# Altium PCB ESP32_CAN_V2.1.PcbDoc
Units mm, origin at the board's own origin, x right, y up, seen from the top; angles counter-clockwise.
Board outline 80 x 75 mm, 2 copper layers (Top Layer, Bottom Layer), stack 0.533 mm thick; 87 components, 93 nets, 361 pads, 50 vias.
Unrouted connection lines stored in the file: 66.
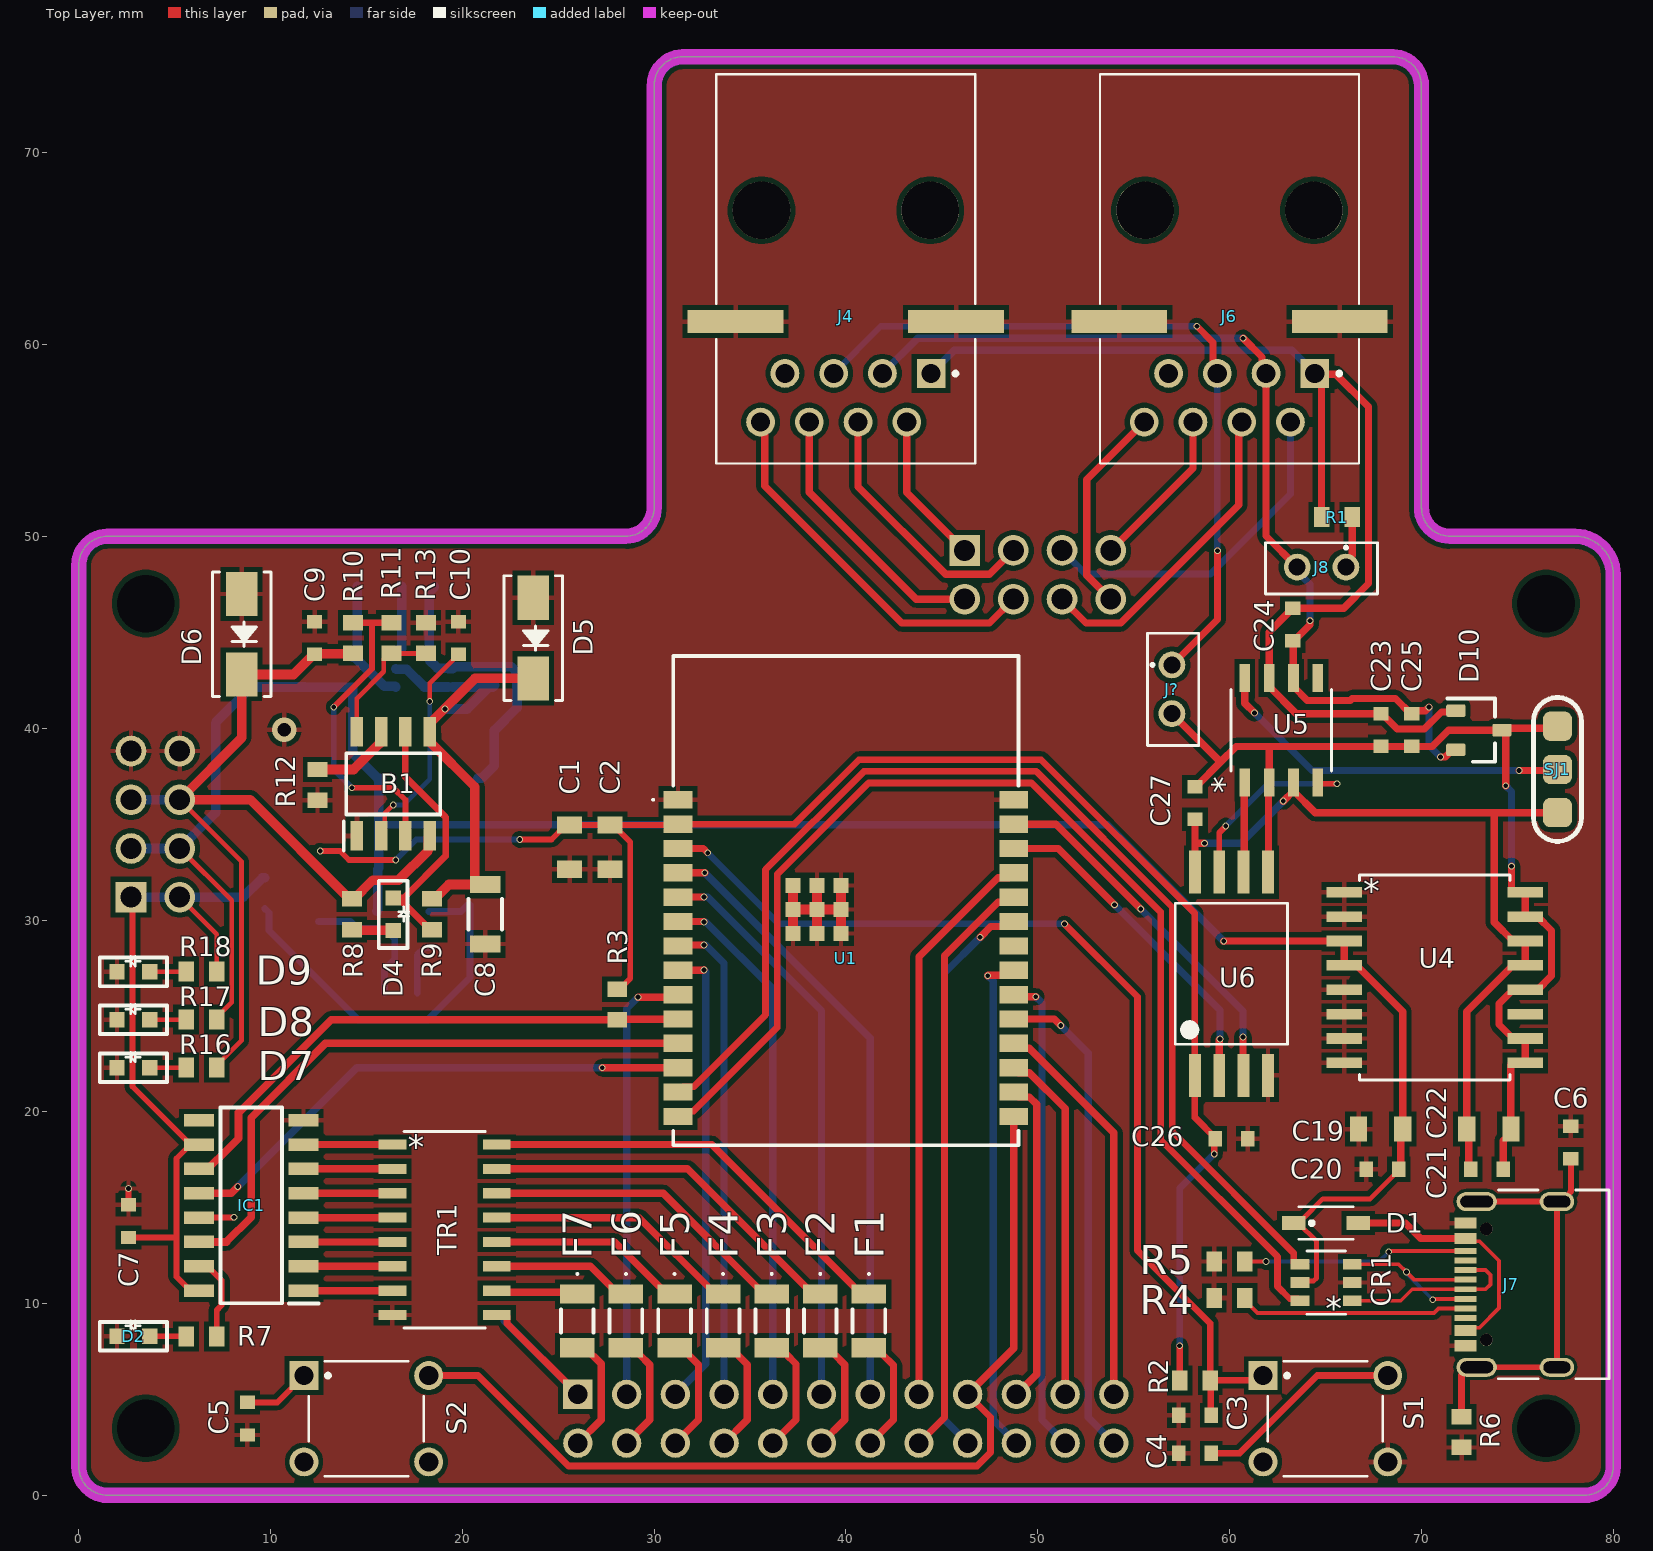
[diagram p0: Top Layer view]
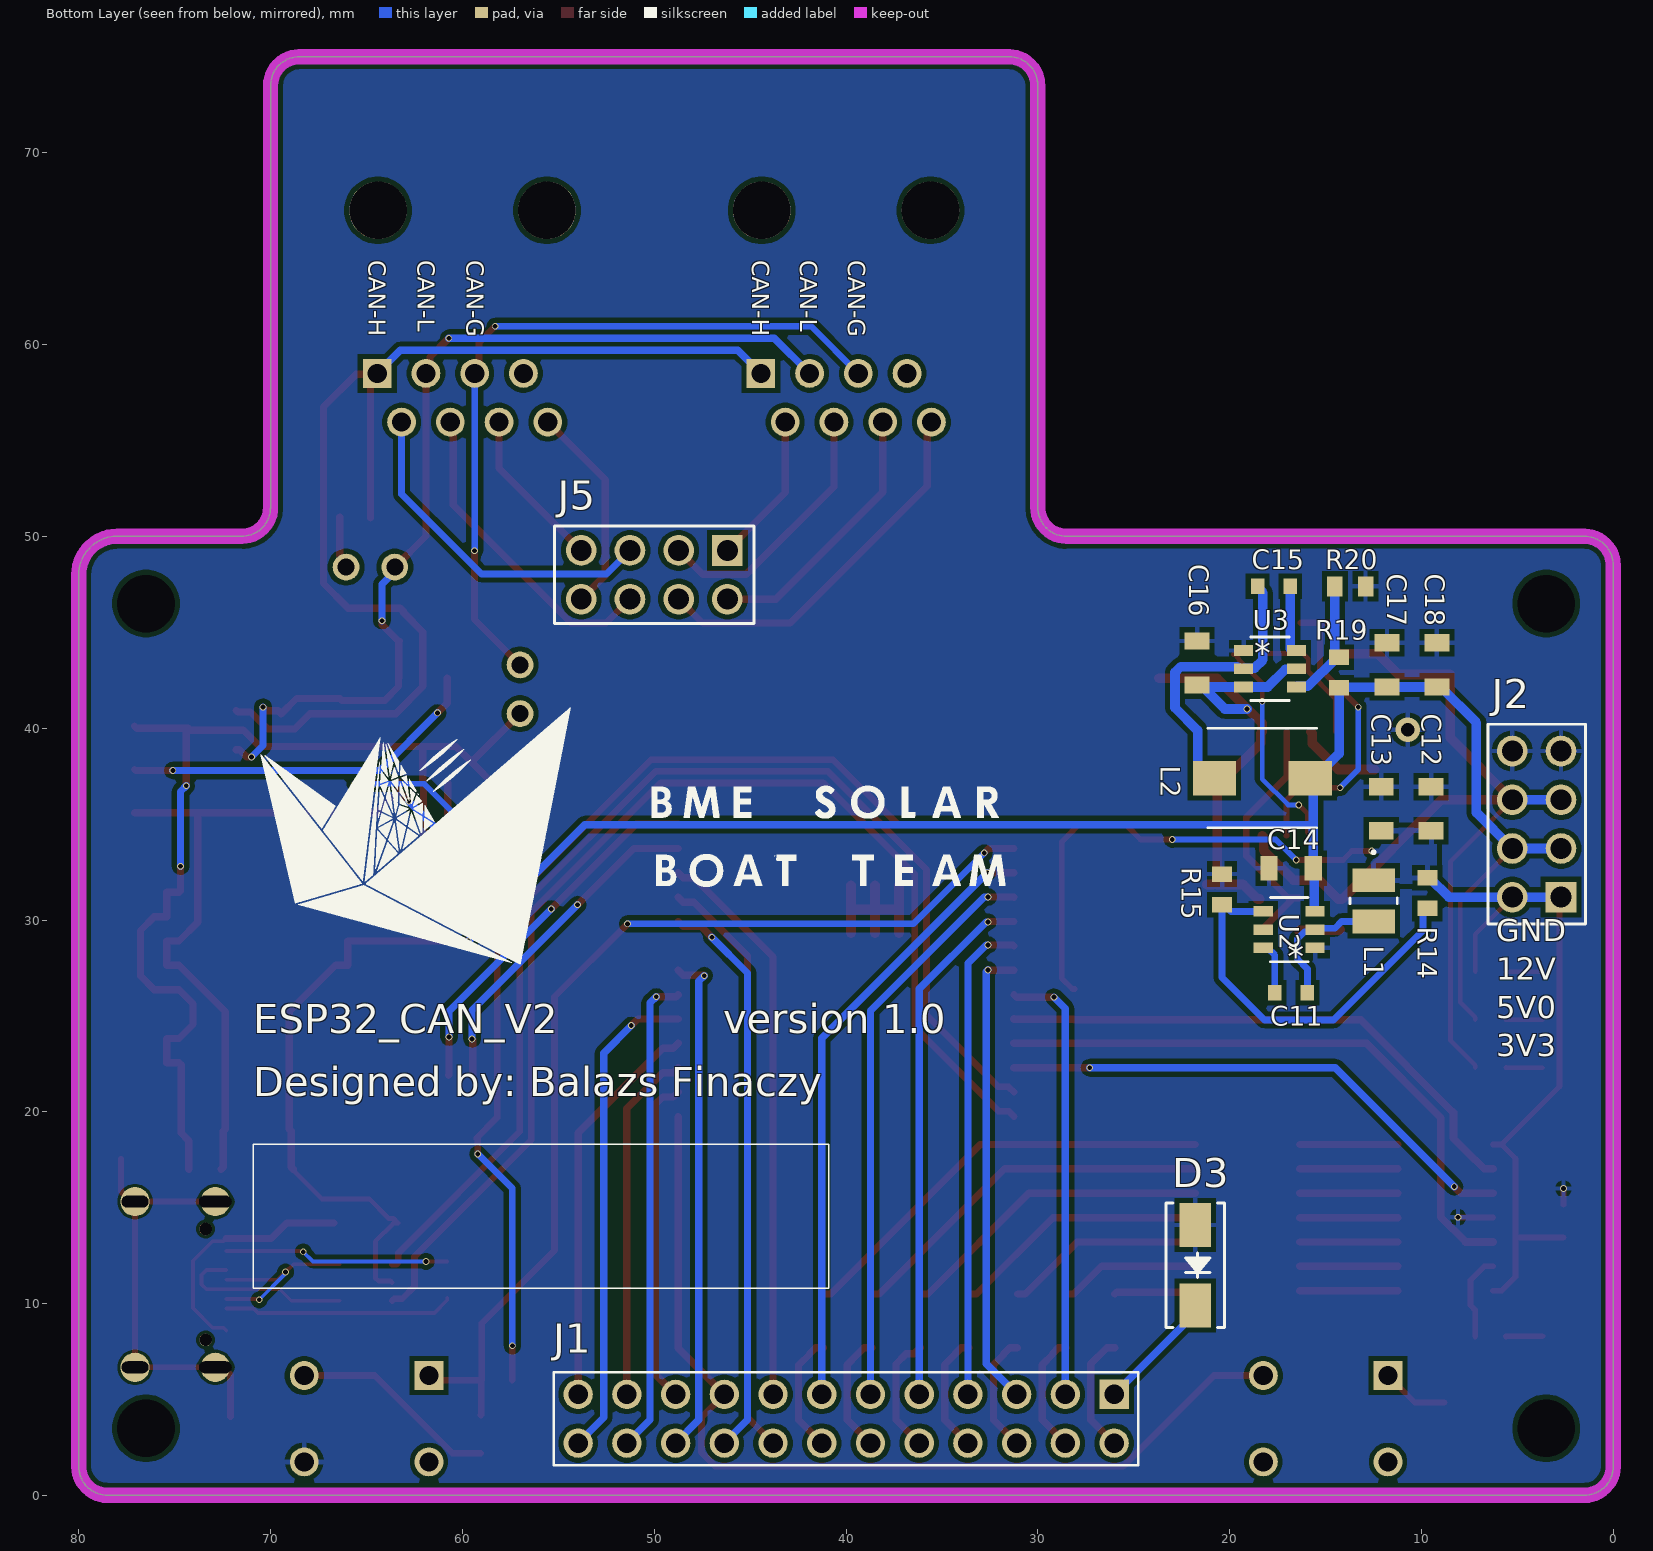
[diagram p1: Bottom Layer view, seen from below]
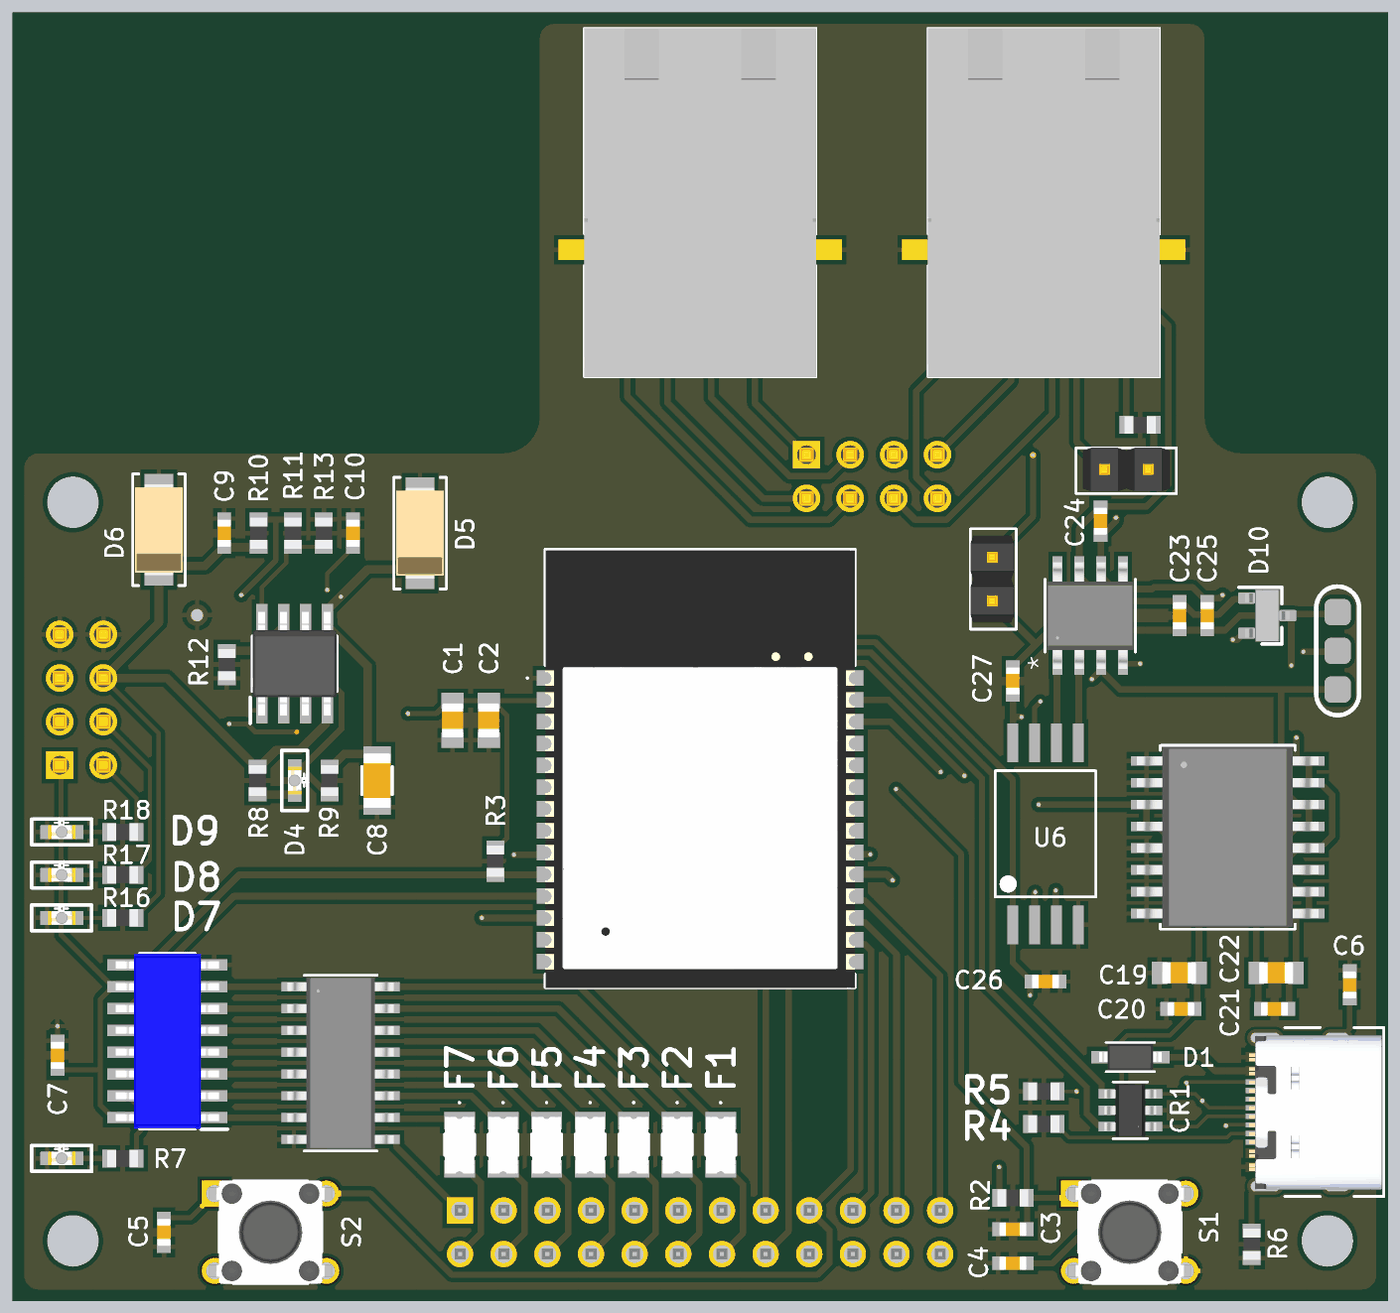
[diagram p2: 3D render of the assembled board from above, using the file's embedded part models]
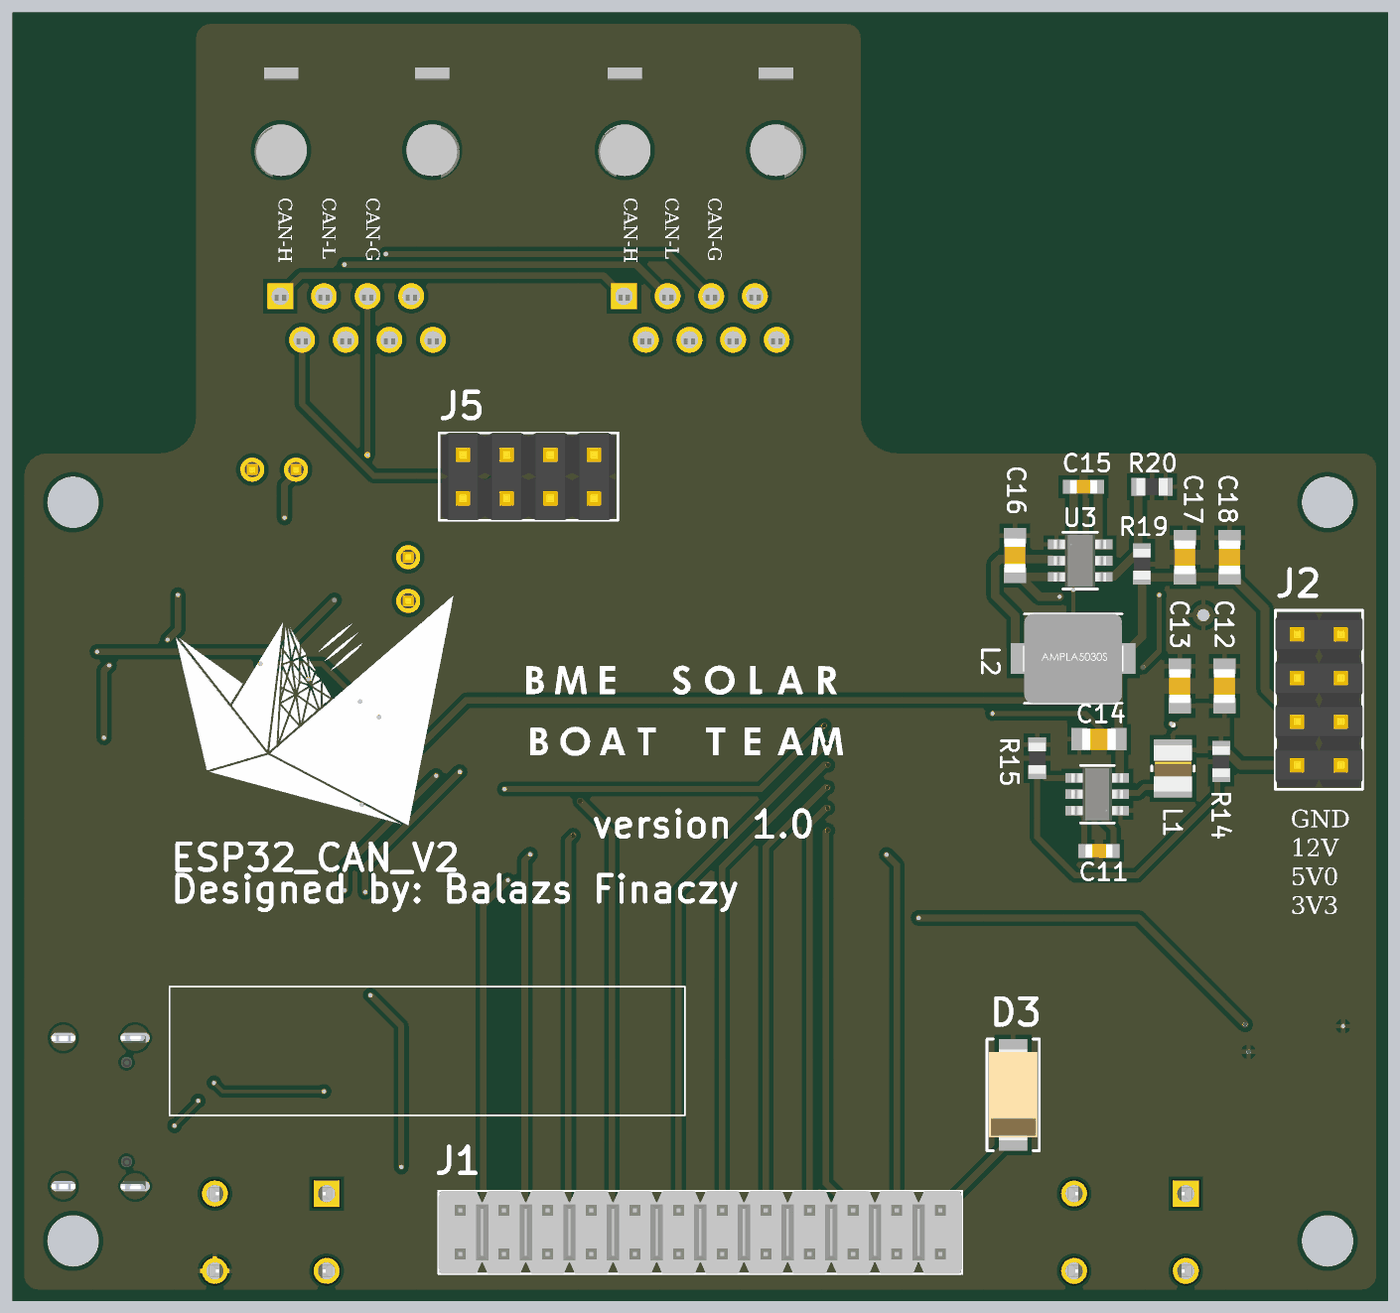
[diagram p3: 3D render of the assembled board from below, using the file's embedded part models]

## Layer stack, top to bottom
Top Solder: solder mask 0.0102, Solder Resist, Dk 3.5
Top Layer: signal copper 0.0356
Dielectric 2: prepreg 0.0711, PP-006, Dk 4.1
Dielectric 1: dielectric 0.32, FR-4, Dk 4.8
Dielectric 3: prepreg 0.0711, PP-006, Dk 4.1
Bottom Layer: signal copper 0.0356
Bottom Solder: solder mask 0.0102, Solder Resist, Dk 3.5

## Board outline
1.506,0.006 cw(c1.506,1.506) 0.006,1.506 0.006,48.506 cw(c1.506,48.506) 1.506,50.006 28.506,50.006 ccw(c28.506,51.506) 30.006,51.506 30.006,73.506 cw(c31.506,73.506) 31.506,75.006 68.506,75.006 cw(c68.506,73.506) 70.006,73.506 70.006,51.506 ccw(c71.506,51.506) 71.506,50.006 78.006,50.006 cw(c78.006,48.006) 80.006,48.006 80.006,1.506 cw(c78.506,1.506) 78.506,0.006

## Design rules (kind name [scope] priority, off if disabled: settings)
Clearance USB_C [InComponent('J7')] p1: gap=0.15 ignorepadtopadclearanceinfootprint=FALSE
Clearance [All] p2: gap=0.254 ignorepadtopadclearanceinfootprint=FALSE
HoleToHoleClearance [All] p1: gap=0.3 allowstackedmicrovias=TRUE
MinimumAnnularRing [All] p1: minimumring=0.3
PolygonConnect [All] p1: connectstyle=Relief reliefconductorwidth=0.254 reliefentries=4 polygonreliefangle="90 Angle" airgapwidth=0.254
RoutingVias [All] p1: holewidth=0.25 width=0.35 viastyle="Through Hole" minholewidth=0.25 minwidth=0.35 maxholewidth=0.45 maxwidth=0.45
SolderMaskExpansion [All] p1: expansion=0 istentingtop=FALSE
SupplyNets "Schematic Supply Nets_4" [InNet('+3V3')] p1: voltage=0.000
SupplyNets "Schematic Supply Nets_3" [InNet('+5V')] p2: voltage=0.000
SupplyNets "Schematic Supply Nets_2" [InNet('+12V_fused')] p3: voltage=0.000
SupplyNets "Schematic Supply Nets_1" [InNet('+12V')] p4: voltage=0.000
SupplyNets "Schematic Supply Nets" [InNet('GND')] p5: voltage=0.000
Width [All] p1: maxlimit=0.5 minlimit=0.2 preferedwidth=0.3 minimp=50.000000 maximp=50.000000 favimp=50.000000
29 further rules are at their usual default settings.

## Classes and differential pairs
net class OUT[6..0]: OUT0 OUT1 OUT2 OUT3 OUT4 OUT5 OUT6
net class GPIO[15..0]: GPIO0 GPIO1 GPIO2 GPIO3 GPIO4 GPIO5 GPIO6 GPIO7 GPIO8 GPIO9 GPIO10 GPIO11 GPIO12 GPIO13 GPIO14 GPIO15
component class U_ESP32_CAN_V2-usb: C6 CR1 D1 J7 R4 R5 R6
component class U_ESP32_CAN_V2-power: 3 B1 C8 C9 C10 C11 C12 C13 C14 C15 C16 C17 C18 D4 D5 D6 D7 D8 D9 L1 L2 R8 R9 R10 R11 R12 R13 R14 R15 R16 R17 R18 R19 R20 U2 U3
component class U_ESP32_CAN_V2-out: C7 D2 D3 F1 F2 F3 F4 F5 F6 F7 IC1 R7 TR1
component class U_ESP32_CAN_V2-mcu: C1 C2 C3 C4 C5 R2 R3 S1 S2 U1
component class U_ESP32_CAN_V2-can: C19 C20 C21 C22 C23 C24 C25 C26 C27 D10 SJ1 U4 U5 U6
component class ESP32_CAN_V2-main: J1 J2 J4 J5 J6 J8 J? R1

## Components (designator, comment, footprint, x,y, rotation, side; value= is the part's Value field where it differs from the comment)
B1 "TPS25921ADR" SOIC127P600X175-8N 16.4,37.1 r90 top
C1 "10u" C0805 25.6,33.8 r90 top
C2 "10u" C0805 27.7,33.8 r90 top
C3 "1u" C0603 58.2,4.177 r0 top
C4 "0.1u" C0603 58.2,2.2 r0 top
C5 "0.1u" C0603 8.8,4 r90 top
C6 "1n" C0603 77.8,18.4 r270 top
C7 "100n" C0603 2.6,14.3 r90 top
C8 "100u" C1206 21.2,30.3 r90 top
C9 "0.1u" C0603 12.3,44.7 r270 top
C10 "2u" C0603 19.8,44.7 r270 top
C11 "100n" C0603 16.8,26.2 r180 bottom
C12 "22u" C0805 9.5,35.8 r270 bottom
C13 "22u" C0805 12.1,35.8 r270 bottom
C14 "10u" C0805 16.8,32.7 r180 bottom
C15 "0.1u" C0603 17.7,47.4 r180 bottom
C16 "2u2" C0805 21.7,43.4 r270 bottom
C17 "22u" C0805 11.8,43.3 r270 bottom
C18 "22u" C0805 9.2,43.3 r270 bottom
C19 "10u" C0805 67.879,19.1 r0 top
C20 "100n" C0603 67.979,17 r0 top
C21 "100n" C0603 73.421,17 r180 top
C22 "10u" C0805 73.521,19.1 r180 top
C23 "47p" C0603 67.9,39.9 r90 top
C24 "47p" C0603 63.3,45.4 r90 top
C25 "47p" C0603 69.5,39.9 r270 top
C26 "100n" C0603 60.1,18.6 r180 top
C27 "100n" C0603 58.2,36.1 r270 top
CR1 "USBLC6-2SC6" SOT23-6L_STM 65.035,11.1 r180 top
D1 "1N5819HW-7-F" SOD3715X145N 65.035,14.2 r0 top
D2 "LED" LED 2.85,8.3 r180 top
D3 "SMAJ30A" SMASeries_LTF 21.8,12 r90 bottom
D4 "LED" LED 16.4,30.3 r90 top
D5 "SMAJ30A" SMASeries_LTF 23.7,44.7 r90 top
D6 "SMAJ58CA" SMASeries_LTF 8.5,44.9 r90 top
D7 "LED" LED 2.85,22.3 r180 top
D8 "LED" LED 2.85,24.8 r180 top
D9 "LED" LED 2.85,27.3 r180 top
D10 "NUP2105L" SOT-23 73,39.9 r0 top
F1 "PTC Fuse" PTSAHT120624V050 41.2,9.1 r270 top
F2 "PTC Fuse" PTSAHT120624V050 38.667,9.1 r270 top
F3 "PTC Fuse" PTSAHT120624V050 36.133,9.1 r270 top
F4 "PTC Fuse" PTSAHT120624V050 33.6,9.1 r270 top
F5 "PTC Fuse" PTSAHT120624V050 31.067,9.1 r270 top
F6 "PTC Fuse" PTSAHT120624V050 28.533,9.1 r270 top
F7 "PTC Fuse" PTSAHT120624V050 26,9.1 r270 top
IC1 "74HC595D" SOIC127P600X175-16N 9,15.121 r180 top
J1 "PinHeader_2x12" AMPHENOL_10129381-924003BLF 40,4 r0 bottom locked
J2 "Conn_2x4" CONN_10129381-X08002XLF_AMP 4,35 r90 bottom locked
J4 "RJE56" AMPHENOL_RJE561881410 40,67 r180 top
J5 "Conn_2x4" CONN_10129381-X08002XLF_AMP 50,48 r0 bottom locked
J6 "RJE56" AMPHENOL_RJE561881410 60,67 r180 top
J7 "USB4105-GF-A" USB4105_GCT 75.8,11 r90 top
J8 "Jumper_1x1" CON2_1X2_TU_TSW 64.8,48.4 r180 top
J? "Jumper_1x1" CON2_1X2_TU_TSW 57,42.03 r270 top
L1 "LCENA2520MKT2R2M0NK" IND_LCEN_2520MK_TAY 12.5,31 r270 bottom
L2 "AMPLA5030S-6R8MT" IND_AMPLA5030S-6R8MT 18.3,37.4 r180 bottom
R1 "120R" R0603 65.6,51 r0 top
R2 "10k" R0603 58.2,6 r180 top
R3 "3k3" R0603 28.08,25.6 r90 top
R4 "5k1" R0603 60,10.3 r0 top
R5 "5k1" R0603 60,12.2 r0 top
R6 "100k" R0603 72.1,3.3 r90 top
R7 "120R" R0603 6.4,8.293 r180 top
R8 "1k" R0603 14.24,30.3 r90 top
R9 "100k" R0603 18.432,30.3 r90 top
R10 "470R" R0603 14.3,44.7 r270 top
R11 "64k9" R0603 16.3,44.7 r90 top
R12 "154k" R0603 12.455,37.05 r90 top
R13 "30k9" R0603 18.1,44.7 r270 top
R14 "31k6" R0603 9.7,31.4 r90 bottom
R15 "10k" R0603 20.4,31.6 r270 bottom
R16 "1k" R0603 6.4,22.307 r0 top
R17 "320R" R0603 6.4,24.807 r0 top
R18 "120R" R0603 6.4,27.307 r0 top
R19 "100k" R0603 14.3,42.9 r270 bottom
R20 "13k7" R0603 13.719,47.4 r0 bottom
S1 "TS02-66-70-BK-260-SCR-D" SW_TS02-66-70-BK-260-SCR-D 65,4 r0 top
S2 "TS02-66-70-BK-260-SCR-D" SW_TS02-66-70-BK-260-SCR-D 15,4 r0 top
SJ1 "Solderj Jumper" "SolderJumper 1x2" 77.1,35.6 r90 top
TR1 "ULN2003ADR" ULN2003ADR2G_OSI 19.079,13.851 r0 top
U1 "ESP32-C6-WROOM-1-N4" ESP32C6WROOM1N4 40,31.01 r0 top
U2 "AP62250WU-7" TSOT26STANDARD_DIO 16.9,29.5 r0 bottom
U3 "LMR51430YDDCR" SOT-23-THIN-6_DDC_TEX 17.9,43.1 r180 bottom
U4 "R05CTE05S-R" SMD_16_10.35X7.5X2.5_RCP 70.7,27 r0 top
U5 "TCAN1051HGDR" D8_TEX 62.7,39.9 r90 top
U6 "ISO6721FQDWVRQ1" DWV0008A-IPC_A 60.1,27.2 r90 top

## Footprints (in the part's own frame and the unit in brackets; to place one, negate y for a bottom-side part, rotate by r counter-clockwise, add the part's x,y. Pads: shape width x height; smd on the part's side, far side on the other; paste and mask are expansions set on the pad)
AMPHENOL_10129381-924003BLF [mm]
  rect 1.53x1.53 / inner round 1.53 / far side rect 1.53x1.53 hole 1.02: 01(-13.97,-1.27)
  round 1.53 hole 1.02: 02(-13.97,1.27) 03(-11.43,-1.27) 04(-11.43,1.27) 05(-8.89,-1.27) 06(-8.89,1.27) 07(-6.35,-1.27) 08(-6.35,1.27) 09(-3.81,-1.27) 10(-3.81,1.27) 11(-1.27,-1.27) 12(-1.27,1.27) 13(1.27,-1.27) 14(1.27,1.27) 15(3.81,-1.27) 16(3.81,1.27) 17(6.35,-1.27) 18(6.35,1.27) 19(8.89,-1.27) 20(8.89,1.27) 21(11.43,-1.27) 22(11.43,1.27) 23(13.97,-1.27) 24(13.97,1.27)
  silkscreen extent -15.24,-2.41 15.24,2.41, body extent -15.24,-2.41 15.24,2.41, height 10.42
AMPHENOL_RJE561881410 [mm]
  rect 1.5x1.5 / inner round 1.5 / far side rect 1.5x1.5 hole 1: 1(-4.445,8.5)
  round 1.5 hole 1: 2(-3.175,11.04) 3(-1.905,8.5) 4(-0.635,11.04) 5(0.635,8.5) 6(1.905,11.04) 7(3.175,8.5) 8(4.445,11.04)
  rect 5x1.2 smd paste-3: G1(-5.75,5.8) G2(5.75,5.8)
  round 3 hole 3 unplated: ""(-4.4,0) ""(4.4,0)
  silkscreen extent -6.75,-7.1 6.75,13.2, body extent -6.75,-7.1 6.75,13.2, height 14.61
C0603 [mm] "Ceramic Capacitors, 0603, body 1.6x0.8mm"
  rect 0.7x0.8 smd: 1(-0.85,0) 2(0.85,0)
  body extent -0.8,-0.4 0.8,0.4, height 0.8
C0805 [mm] "Ceramic Capacitors, body 2x1.25mm"
  rect 0.9x1.3 smd: 1(-1.15,0) 2(1.15,0)
  body extent -1,-0.63 1,0.63, height 0.8
C1206 [mm] "Ceramic Capacitors, body 3.2x1.6mm"
  rect 0.9x1.6 smd: 1(-1.55,0) 2(1.55,0)
  silkscreen extent -0.8,-0.87 0.8,0.87, body extent -1.6,-0.8 1.6,0.8, height 0.95
CON2_1X2_TU_TSW [mil]
  round 55 hole 35 paste-99999 mask+0: 1(-50,0) 2(50,0)
  silkscreen extent -115,-50 115,55, body extent -100,-50 100,50, height 500
CONN_10129381-X08002XLF_AMP [mil]
  rect 63x63 hole 43 paste-99999 mask+0: 1(-150,-50)
  round 63 hole 43 paste-99999 mask+0: 2(-150,50) 3(-50,-50) 4(-50,50) 5(50,-50) 6(50,50) 7(150,-50) 8(150,50)
  silkscreen extent -205,-100 205,100, body extent -200,-100 200,100, height 338
D8_TEX [mm]
  rect 1.455x0.558 smd paste+0 mask+0: 1(-2.721,1.905) 2(-2.721,0.635) 3(-2.721,-0.635) 4(-2.721,-1.905) 5(2.721,-1.905) 6(2.721,-0.635) 7(2.721,0.635) 8(2.721,1.905)
  silkscreen extent -2.12,-2.63 2.12,2.63, body extent -3.1,-2.5 3.1,2.5, height 1.76
DWV0008A-IPC_A [mm]
  rect 2.254x0.622 smd paste+0 mask+0: 1(-5.301,1.905) 2(-5.301,0.635) 3(-5.301,-0.635) 4(-5.301,-1.905) 5(5.301,-1.905) 6(5.301,-0.635) 7(5.301,0.635) 8(5.301,1.905)
  silkscreen extent -3.67,-2.93 3.67,2.93
ESP32C6WROOM1N4 [mm]
  rect 1.5x0.9 smd: 1(-8.75,5.26) 2(-8.75,3.99) 3(-8.75,2.72) 4(-8.75,1.45) 5(-8.75,0.18) 6(-8.75,-1.09) 7(-8.75,-2.36) 8(-8.75,-3.63) 9(-8.75,-4.9) 10(-8.75,-6.17) 11(-8.75,-7.44) 12(-8.75,-8.71) 13(-8.75,-9.98) 14(-8.75,-11.25) 15(8.75,-11.25) 16(8.75,-9.98) 17(8.75,-8.71) 18(8.75,-7.44) 19(8.75,-6.17) 20(8.75,-4.9) 21(8.75,-3.63) 22(8.75,-2.36) 23(8.75,-1.09) 24(8.75,0.18) 25(8.75,1.45) 26(8.75,2.72) 27(8.75,3.99) 28(8.75,5.26)
  rect 0.8x0.8 smd: 29(-1.505,-0.46) 30(-1.505,0.79) 31(-2.755,0.79) 32(-2.755,-0.46) 33(-2.755,-1.71) 34(-1.505,-1.71) 35(-0.255,-1.71) 36(-0.255,-0.46) 37(-0.255,0.79)
  silkscreen extent -10.1,-12.75 9,12.75, body extent -9.01,-12.8 9.01,12.7, height 3.1
IND_AMPLA5030S-6R8MT [mm]
  rect 2.25x1.8 smd: 1(-2.5,0) 2(2.5,0)
  silkscreen extent -2.85,-2.6 2.85,2.6, body extent -2.92,-2.6 2.92,2.6, height 2.8
IND_LCEN_2520MK_TAY [mil]
  rect 48.78x87 smd paste+0 mask+0: 1(-42.39,0) 2(42.39,0)
  silkscreen extent -103,-48 6,48, body extent -53,-44 53,44, height 47
LED [mm]
  rect 0.8x0.8 smd: 1(-0.85,0) 2(0.85,0)
  silkscreen extent -1.75,-0.8 1.75,0.75, body extent -0.8,-0.4 0.8,0.4, height 0.95
PTSAHT120624V050 [mm]
  rect 1x1.8 smd: 1(-1.4,0) 2(1.4,0)
  silkscreen extent -2.5,-0.85 0.6,0.85, body extent -1.62,-0.85 1.68,0.85, height 1.06
R0603 [mm]
  rect 0.808x1.041 smd paste+0 mask+0: 1(-0.798,0) 2(0.798,0)
  body extent -0.9,-0.5 0.9,0.5, height 0.56
SMASeries_LTF [mm]
  rect 2.3x1.651 smd paste+0 mask+0: 1(-2.1,0) 2(2.1,0)
  silkscreen extent -3.25,-1.54 3.25,1.52, body extent -2.64,-1.4 2.64,1.4, height 2.34
SMD_16_10.35X7.5X2.5_RCP [mm]
  rect 1.849x0.558 smd paste+0 mask+0: 1(-4.722,4.445) 2(-4.722,3.175) 3(-4.722,1.905) 4(-4.722,0.635) 5(-4.722,-0.635) 6(-4.722,-1.905) 7(-4.722,-3.175) 8(-4.722,-4.445) 9(4.722,-4.445) 10(4.722,-3.175) 11(4.722,-1.905) 12(4.722,-0.635) 13(4.722,0.635) 14(4.722,1.905) 15(4.722,3.175) 16(4.722,4.445)
  silkscreen extent -3.92,-5.35 3.92,5.35, body extent -5.3,-5.22 5.3,5.22, height 2.64
SOD3715X145N [mm]
  rect 1.21x0.73 smd: A(1.68,0) C(-1.68,0)
  silkscreen extent -1.43,-0.85 1.43,0.85, body extent -1.83,-0.77 1.83,0.77, height 1.51
SOIC127P600X175-8N [mm]
  rect 1.528x0.65 smd: 1(-2.711,1.905) 2(-2.711,0.635) 3(-2.711,-0.635) 4(-2.711,-1.905) 5(2.711,-1.905) 6(2.711,-0.635) 7(2.711,0.635) 8(2.711,1.905)
  silkscreen extent -3.47,-2.45 1.6,2.58, body extent -3.01,-2.45 3.01,2.45, height 1.63
SOIC127P600X175-16N [mm]
  rect 1.55x0.65 smd: 1(-2.725,4.445) 2(-2.725,3.175) 3(-2.725,1.905) 4(-2.725,0.635) 5(-2.725,-0.635) 6(-2.725,-1.905) 7(-2.725,-3.175) 8(-2.725,-4.445) 9(2.725,-4.445) 10(2.725,-3.175) 11(2.725,-1.905) 12(2.725,-0.635) 13(2.725,0.635) 14(2.725,1.905) 15(2.725,3.175) 16(2.725,4.445)
  silkscreen extent -3.5,-5.1 1.6,5.12, body extent -3,-5.1 3,5.1, height 1.56
"SolderJumper 1x2" [mil]
  rrect50% 60x60 smd: 1(88.58,0) 2(0,0) 3(177.17,0)
  silkscreen extent -59,-49 236,49
SOT23-6L_STM [mil]
  rect 38.5x22 smd paste+0 mask+0: 1(-53.75,37.4) 2(-53.75,0) 3(-53.75,-37.4) 4(53.75,-37.4) 5(53.75,0) 6(53.75,37.4)
  silkscreen extent -40,-65 40,65, body extent -59,-60 59,60, height 57
SOT-23 [mm] "SOT23, 3-Leads, IPC Medium Density, TO-236"
  rrect25% 1x0.65 smd: 1(-1.2,1.02) 2(-1.2,-1.02) 3(1.2,0)
  silkscreen extent -1.65,-1.65 0.85,1.65, body extent -1.3,-1.52 1.3,1.52, height 1.3
SOT-23-THIN-6_DDC_TEX [mm]
  rect 0.998x0.558 smd paste+0 mask+0: 1(-1.375,0.95) 2(-1.375,0) 3(-1.375,-0.95) 4(1.375,-0.95) 5(1.375,0) 6(1.375,0.95)
  silkscreen extent -1,-1.65 1,1.65, body extent -1.52,-1.52 1.52,1.52, height 1.09
SW_TS02-66-70-BK-260-SCR-D [mm]
  rect 1.508x1.508 / inner round 1.508 / far side rect 1.508x1.508 hole 1 mask+0.102: 1(-3.25,2.25)
  round 1.508 hole 1 mask+0.102: 2(3.25,2.25) 3(-3.25,-2.25) 4(3.25,-2.25)
  silkscreen extent -3,-3 3,3, body extent -3.6,-3 3.6,3, height 7
TSOT26STANDARD_DIO [mm]
  rect 0.998x0.558 smd paste+0 mask+0: 1(-1.35,0.95) 2(-1.35,0) 3(-1.35,-0.95) 4(1.35,-0.95) 5(1.35,0) 6(1.35,0.95)
  silkscreen extent -0.98,-1.68 0.98,1.68, body extent -1.5,-1.55 1.5,1.55, height 0.99
ULN2003ADR2G_OSI [mm]
  rect 1.455x0.533 smd paste+0 mask+0: 1(-2.721,4.445) 2(-2.721,3.175) 3(-2.721,1.905) 4(-2.721,0.635) 5(-2.721,-0.635) 6(-2.721,-1.905) 7(-2.721,-3.175) 8(-2.721,-4.445) 9(2.721,-4.445) 10(2.721,-3.175) 11(2.721,-1.905) 12(2.721,-0.635) 13(2.721,0.635) 14(2.721,1.905) 15(2.721,3.175) 16(2.721,4.445)
  silkscreen extent -2.12,-5.12 2.12,5.12, body extent -3.1,-4.99 3.1,4.99, height 1.73
USB4105_GCT [mil]
  round 26 / inner round 60 / far side round 26 hole 26 unplated paste-99999 mask+0: 17(-113.78,94.91) 18(113.78,94.91)
  rect 23x45 smd paste-22.5 mask-22.5: A1-B12(-125.98,137.24) A4-B9(-94.49,137.24) B1-A12(125.98,137.24) B4-A9(94.49,137.24)
  rect 12x45 smd paste+0 mask+0: A5(-49.21,137.24) A6(-9.84,137.24) A7(9.84,137.24) A8(49.21,137.24) B5(68.9,137.24) B6(29.53,137.24) B7(-29.53,137.24) B8(-68.9,137.24)
  oval 39x71 / inner oval 39x71 / far side round 60 hole 55 slot 24 at 0 deg paste-99999 mask-35.5: SHELL(-170.08,-49.97) SHELL(170.08,-49.97)
  oval 39x83 / inner oval 39x83 / far side round 60 hole 67 slot 24 at 0 deg paste-99999 mask-41.5: SHELL(-170.08,114.6) SHELL(170.08,114.6)
  silkscreen extent -194,-157 194,70, body extent -177,-152 175,152, height 130

## Part data
B1: "18V, 1.6A, 90m eFuse with Adjustable +/-2% Accurate Current Limit", Manufacturer_Name="Texas Instruments", Mouser Part Number=595-TPS25921ADR, Datasheet Link=http://www.ti.com/lit/gpn/tps25921a, Geometry.Height=1.75mm, Manufacturer_Part_Number=TPS25921ADR, Mouser Price/Stock=https://www.mouser.co.uk/ProductDetail/Texas-Instruments/TPS25921ADR?qs=m%2F7bTylgptfvwfVPRm0ALQ%3D%3D
C1 C2 C3 C4 C5 C6 C7 C8 C9 C10 C11 C12 C13 C14 C15 C16 C17 C18 C19 C20 C21 C22 C23 C24 C25 C26 C27: library part C
CR1: "ESD Protection for USB 2.0 High Speed", Manufacturer_Name=STMicroelectronics, Copyright="Copyright (C) 2025 Ultra Librarian. All rights reserved.", Manufacturer_Part_Number=USBLC6-2SC6, RefDes=RefDes, Type=Type
D1: "Diode Schottky 40 V 1A Surface Mount SOD-123", Package="SOD-123 Fairchild Semiconductor", Availability="In Stock", Check_prices=https://www.snapeda.com/parts/1N5819HW-7-F/Diodes+Inc./view-part/?ref=eda, MF="Diodes Inc.", MP=1N5819HW-7-F, Price=None, Purchase-URL=https://pricing.snapeda.com/search/part/1N5819HW-7-F/?ref=eda, SnapEDA_Link=https://www.snapeda.com/parts/1N5819HW-7-F/Diodes+Inc./view-part/?ref=snap
D3 D5 D6: "No Description Available", Manufacturer_Name="Littelfuse Inc", Copyright="Copyright (C) 2026 Ultra Librarian. All rights reserved."
  D3 D5: Manufacturer_Part_Number=SMAJ30A
  D6: Manufacturer_Part_Number=SMAJ58CA
D10: library part TVS-Bidirectional-Diode_Dual, ki_description="TVS Dual Diode", ki_keywords="TVS Dual Diode"
F1 F2 F3 F4 F5 F6 F7: "PTSAHT1206"
IC1: "Shift Register Single 8-Bit Serial to Serial/Parallel 16-Pin SOIC T/R", Manufacturer_Name=Toshiba, Mouser Part Number=757-74HC595D, Datasheet Link=https://toshiba.semicon-storage.com/info/docget.jsp?did=36768&prodName=74HC595D, Geometry.Height=1.75mm, Manufacturer_Part_Number=74HC595D, Mouser Price/Stock=https://www.mouser.co.uk/ProductDetail/Toshiba/74HC595D?qs=7EBvPakHacViJoQmXKcnew%3D%3D
J1: Package=None, Availability=Unavailable, MF="{'manufacturer': u'Amphenol ICC (FCI)'}", MP=10129381-924003BLF, Price=None
J2 J5: library part PinHeader_2x4, Manufacturer_Name="Amphenol ICC", Manufacturer_Part_Number=10129381-908002BLF, Copyright="Copyright (C) 2026 Ultra Librarian. All rights reserved.", RefDes=RefDes, Type=Type
J4 J6: library part RJE561881410, "Modular Jack - Right Angle, Input Output Connectors 8P8C, Without Shield .", Package=None, Check_prices=https://www.snapeda.com/parts/RJE561881410/Amphenol/view-part/?ref=eda, MF="Amphenol Commercial Products", MP=RJE561881410, Reference=RJE56-188-1410, SnapEDA_Link=https://www.snapeda.com/parts/RJE561881410/Amphenol/view-part/?ref=snap, Supplier=Farnell, Type=RJE56
J7: "Description", Manufacturer_Name="Global Connector Technology", Copyright="Copyright (C) 2025 Ultra Librarian. All rights reserved.", Manufacturer_Part_Number=USB4105-GF-A, RefDes=RefDes, Type=Type
J8 J?: library part TSW-102-08-T-S, "No Description Available", Manufacturer_Name="Samtec Inc", Copyright="Copyright (C) 2026 Ultra Librarian. All rights reserved.", Manufacturer_Part_Number=TSW-102-08-T-S, RefDes=RefDes, Type=Type
L1: library part L, "No Description Available", Manufacturer_Name="TAIYO YUDEN", Copyright="Copyright (C) 2026 Ultra Librarian. All rights reserved.", Manufacturer_Part_Number=LCENA2520MKT2R2M0NK
L2: "Inductor Power Shielded/Molded Wirewound 6.8uH 20% 100KHz Carbonyl Powder 4A 0.0762Ohm DCR 2220 T/R", Package=Package, Availability=Unavailable, Check_prices=https://www.snapeda.com/parts/AMPLA5030S-6R8MT/Abracon+LLC/view-part/?ref=eda, MF="Abracon LLC", MP=AMPLA5030S-6R8MT, Price=None, SnapEDA_Link=https://www.snapeda.com/parts/AMPLA5030S-6R8MT/Abracon+LLC/view-part/?ref=snap
R1 R2 R3 R4 R5 R6 R7 R8 R9 R10 R11 R12 R13 R14 R15 R16 R17 R18 R19 R20: library part R
S1 S2: "6 x 6 mm, 7 mm Actuator Height, 260 gf, Black, Short Crimped, Through Hole, SPST, Tactile Switch", Package=None, Check_prices=https://www.snapeda.com/parts/TS02-66-70-BK-260-SCR-D/Same+Sky/view-part/?ref=eda, MF="Same Sky", MP=TS02-66-70-BK-260-SCR-D, SnapEDA_Link=https://www.snapeda.com/parts/TS02-66-70-BK-260-SCR-D/Same+Sky/view-part/?ref=snap
SJ1: library part "Solder Jumper 1x2"
TR1: library part ULN2003ADR2G, "No Description Available", Manufacturer_Name=onsemi, Copyright="Copyright (C) 2026 Ultra Librarian. All rights reserved.", Manufacturer_Part_Number=ULN2003ADR2G, RefDes=RefDes, Type=Type
U1: library part ESP32-C6-WROOM-1-N4_reorder, "802.15.4, Bluetooth, WiFi Bluetooth v5.0, Zigbee Transceiver Module 2.4GHz PCB Trace Surface Mount", Manufacturer_Name="Espressif Systems", Mouser Part Number=356-ESP32C6WROOM1N4, Datasheet Link=https://www.espressif.com/sites/default/files/documentation/esp32-c6-wroom-1_wroom-1u_datasheet_en.pdf, Geometry.Height=3.25mm, Manufacturer_Part_Number=ESP32-C6-WROOM-1-N4, Mouser Price/Stock=https://www.mouser.co.uk/ProductDetail/Espressif-Systems/ESP32-C6-WROOM-1-N4?qs=8Wlm6%252BaMh8R1JRAtXlt87w%3D%3D
U2: "No Description Available", Manufacturer_Name="Diodes Inc", Copyright="Copyright (C) 2026 Ultra Librarian. All rights reserved.", Manufacturer_Part_Number=AP62250WU-7, RefDes=RefDes, Type=Type
U3: "SIMPLE SWITCHER&reg; 4.5-V to 36-V, 3-A synchronous buck converter with 40-&micro;A IQ 6-SOT-23-THIN -40 to 150", Manufacturer_Name="Texas Instruments", Copyright="Copyright (C) 2025 Ultra Librarian. All rights reserved.", Manufacturer_Part_Number=LMR51430YDDCR, RefDes=RefDes, Type=Type
U4: "DC/DC converter", Manufacturer_Name="Recom Power", Copyright="Copyright (C) 2026 Ultra Librarian. All rights reserved.", Manufacturer_Part_Number=R05CTE05S-R, RefDes=RefDes, Type=Type
U5: "Fault Protected CAN Transceiver With Flexible Data-Rate 8-SOIC -55 to 125", Manufacturer_Name="Texas Instruments", Copyright="Copyright (C) 2026 Ultra Librarian. All rights reserved.", Datasheet=https://www.ti.com/lit/gpn/tcan1051hg, Manufacturer_Part_Number=TCAN1051HGDR, RefDes=RefDes, Type=Type
U6: "Automotive, general-purpose, dual-channel, 1/1 digital isolator 8-SOIC -40 to 125", Manufacturer_Name="Texas Instruments", Copyright="Copyright (C) 2026 Ultra Librarian. All rights reserved.", Datasheet=https://www.ti.com/lit/gpn/iso6721-q1, Manufacturer_Part_Number=ISO6721FQDWVRQ1, RefDes=RefDes, Type=TYPE

## Free pads (board coordinates)
  round 0 hole 3 unplated: 12(3.5,46.5) 13(3.5,3.5) 14(76.5,3.5) 15(76.5,46.5)

## Via types
v1: diameter 0.35, hole 0.25, Top Layer to Bottom Layer, tented both sides, 48 vias
v2: diameter 0.35, hole 0.25, Top Layer to Bottom Layer, 1 vias
v3: diameter 1.27, hole 0.711, Top Layer to Bottom Layer, tented both sides, 1 vias

## Nets (pads, with @x,y where several pads share a name; then routed paths per layer and width w, separated by ;. In a path a pad name is that pad's centre, name@x,y a point inside that pad or via, vN(x,y) a via of type N, cw(c..) or ccw(c..) an arc to the next point about the centre after c; other vN are vias at no path point)
5V0_CAN_6: C21.2 C22.2 C27.2 SJ1.2 U4.13 U4.14 U5.3 U6.8 | length 45.1
  Top Layer w0.381: U6.8 58.197,32.503 58.197,33.875 ; C27.2 58.197,35.247 58.197,33.875 ; v1(58.7,34) 58.322,34 58.197,33.875 ; v1(62.8,36.2) 62.805,36.2 U5.3@63.335,36.73 ; U5.3 U5.3@63.335,36.73 ; C21.2 72.471,17.1 72.471,19 C22.2 72.371,25.23 74.776,27.635 U4.13 U4.14 74.776,28.905 73.8,29.881 73.8,35.6 ; SJ1.2 73.8,35.6 ; U5.3@63.335,36.73 64.465,35.6 73.8,35.6
  Bottom Layer w0.381: v1(58.7,34) 60.6,34 v1(62.8,36.2)
+3V3: C1.2 C2.2 C7.1 C12.2 C13.2 C26.2 IC1.10 IC1.16 J2.1 J2.2 L1.1 R2.2 R3.2 R14.2 R18.2 U1.2 U6.1 | length 124
  Top Layer w0.25: J2.2 7.198,29.262 R18.2
  Top Layer w0.3: C7.1 5.046,13.45 5.096,13.5 ; J2.1 2.804,31.116 2.804,21.317 IC1.10@5.825,18.296 ; IC1.16 5.825,10.676 5.096,11.405 5.096,13.5 ; IC1.10 IC1.10@5.825,18.296 ; v1(12.6,33.6) 13.624,33.6 14.095,33.129 v1(16.529,33.129) ; v1(23,34.2) 24.65,34.2 25.4,34.95 C1.2 C2.2 C2.2@27.874,34.95 ; R3.2 28.196,26.398 28.754,26.956 28.754,34.07 28.2,34.624 28.2,34.65 27.9,34.95 C2.2@27.874,34.95 ; U1.2 31.2,34.95 C2.2@27.874,34.95 ; 5.096,13.5 5.096,17.567 IC1.10@5.825,18.296
  Top Layer w0.35: U1.2 37.33,35 40.687,38.357 50.178,38.357 58.195,30.34 U6.1 58.195,19.705 59.25,18.65 C26.2 59.21,18.56 59.21,17.81 v1(59.2,17.8) ; v1(57.4,7.8) 57.402,7.798 R2.2
  Bottom Layer w0.3: v1(16.529,33.129) 17.6,34.2 v1(23,34.2)
  Bottom Layer w0.35: v1(57.4,7.8) 57.4,16 v1(59.2,17.8)
  Bottom Layer w0.5: J2.1 J2.2 8.576,31.19 9.584,32.198 R14.2
+5V: C14.2 C17.2 C18.2 C19.2 C20.2 CR1.5 D1.C J2.3 J2.4 L2.2 R17.2 R19.2 U2.3 U4.3 U4.4 | length 118.3
  Top Layer w0.25: J2.4 7.981,31.019 7.981,25.706 7.198,24.923 R17.2 ; CR1.5 63.754,11.184 64.384,11.184 64.537,11.337 64.537,13.257 63.595,14.2 D1.C 63.595,14.44 63.84,14.44 64.863,15.463 67.342,15.463 68.829,16.95 C20.2
  Top Layer w0.381: v1(59.7,28.9) 59.705,28.905 U4.3 U4.4 66.624,27.635 69.029,25.23 C19.2 68.929,19 68.929,17.1 C20.2
  Bottom Layer w0.381: 15.65,34.975 53.625,34.975 v1(59.7,28.9)
  Bottom Layer w0.5: J2.3 J2.4 7.14,35.6 7.14,40.29 9,42.15 C18.2 C17.2 11.824,42.126 14.276,42.126 R19.2 14.3,38.675 15.575,37.4 L2.2 15.65,37.25 15.65,34.975 C14.2 15.6,32.65 15.6,30.479 15.571,30.45 U2.3
+12V: B1.4 C9.2 D6.1 J2.5 J2.6 R8.2 R10.2 R16.2 | length 49.3
  Top Layer w0.25: J2.6 8.485,33.055 8.485,23.71 7.198,22.423 R16.2
  Top Layer w0.5: R8.2 14.124,31.098 8.952,36.27 J2.6 8.5,39.5 D6.1 11.2,42.8 12.25,43.85 C9.2 12.326,43.876 14.274,43.876 R10.2 ; R8.2@14.357,31.098 15.335,32.076 16.676,32.076 18.23,33.63 18.23,34.314 B1.4
  Bottom Layer w0.5: J2.5 J2.6
+12V_fused: B1.5 C8.2 C16.2 D5.1 R9.2 U3.3 U3.5 | length 27.2
  Top Layer w0.5: R9.2 18.548,31.098 19.3,31.85 C8.2@20.65,31.85 ; C8.2 20.85,31.85 20.65,32.05 20.65,36.95 18.38,39.22 18.38,39.736 B1.5 18.305,40.25 20.655,42.6 D5.1
  Bottom Layer w0.5: U3.5 16.554,43.071 17.105,43.071 18.026,42.15 U3.3 ; v1(19.1,41) 20.25,41 21.5,42.25 C16.2 21.6,42.15 U3.3@19.495,42.15
CAN_GND: C21.1 C22.1 C23.1 C25.2 C27.1 D10.3 J?.2 SJ1.3 U4.9 U4.10 U4.12 U4.15 U4.16 U5.2 U6.5 | length 58.7
  Top Layer w0.381: J?.2 59.51,38.25 59.55,38.25 ; C27.1 58.25,36.95 59.55,38.25 ; U6.5 62.035,32.531 62.035,37.149 U5.2 62.065,39.05 ; C21.1 74.271,18.5 74.671,18.9 C22.1 74.671,22.45 74.776,22.555 U4.9 U4.10 74.776,23.825 74.053,24.549 74.053,25.641 74.776,26.365 U4.12 76.067,26.365 76.79,27.089 76.79,29.451 76.067,30.175 U4.15 U4.16 74.789,31.445 74.7,31.534 v1(74.7,32.8) ; D10.3@74.3,40 77,40 SJ1.3 ; v1(74.4,37) 74.4,39.765 74.266,39.9 71.414,39.9 70.564,39.05 C25.2 C23.1 62.065,39.05 ; 59.55,38.25 60.35,39.05 62.065,39.05
  Bottom Layer w0.381: v1(74.4,37) 74.7,36.7 v1(74.7,32.8)
CAN_RX_6: U5.4 U6.7 | length 10.3
  Top Layer w0.3: U6.7 59.465,34.551 59.8,34.886 v1(59.8,34.9) ; U5.4 64.684,37.1 v1(65.6,37.1)
  Bottom Layer w0.3: v1(59.8,34.9) 62,37.1 v1(65.6,37.1)
CAN_TX_6: U5.1 U6.6 | length 4.7
  Top Layer w0.381: U6.6 60.765,32.531 60.765,37.149 U5.1
GND: B1.1 C1.1 C2.1 C3.1 C4.1 C5.1 C6.1 C7.2 C8.1 C9.1 C10.1 C12.1 C13.1 C14.1 C16.1 C17.1 C18.1 C19.1 C20.1 C26.1 CR1.2 D2.2 D3.2 D5.2 D6.2 D7.2 D8.2 D9.2 IC1.8 IC1.13 J2.7 J2.8 J4.G1 J4.G2 J6.G1 J6.G2 J7.A1-B12 J7.B1-A12 R4.1 R5.1 R6.1 R12.1 R13.1 R15.1 R20.1 S1.4 TR1.8 U1.1 U1.28 U1.29 U1.30 U1.31 U1.32 U1.33 U1.34 U1.35 U1.36 U1.37 U2.1 U3.1 U4.1 U4.2 U4.5 U4.6 U4.7 U4.8 U6.4 | length 12.7
  Top Layer w0.3: C7.2 v1(2.6,16) ; IC1.13 6.282,14.493 8.093,14.493 v1(8.1,14.5)
  Top Layer w0.5: U1.33 U1.32 ; U1.31 U1.32 ; U1.34 U1.29 ; U1.30 U1.29 ; U1.35 U1.36 ; U1.37 U1.36 ; U1.32 U1.29 ; U1.29 U1.36
  other v3: 10.727,39.927
GPIO0: J1.03 U1.9 | length 23.1
  Top Layer w0.381: v1(29.165,25.98) 31.12,25.98 U1.9
  Bottom Layer w0.381: J1.03 28.57,25.385 v1(29.165,25.98)
GPIO1: J1.05 U1.8 | length 24.2
  Top Layer w0.381: U1.8 32.58,27.38 v1(32.6,27.4)
  Bottom Layer w0.381: J1.05 32.7,6.86 32.7,27.3 v1(32.6,27.4)
GPIO2: J1.07 U1.7 | length 25.3
  Top Layer w0.381: U1.7 31.3,28.7 v1(32.6,28.7)
  Bottom Layer w0.381: v1(32.6,28.7) 32.7,28.7 33.65,27.75 J1.07
GPIO3: J1.09 U1.6 | length 27.4
  Top Layer w0.381: U1.6 v1@32.6,29.92
  Bottom Layer w0.381: v1@32.7,29.9 36.19,26.41 J1.09
  other v1: 32.6,29.9
GPIO4: J1.11 U1.5 | length 29.9
  Top Layer w0.381: U1.5 31.26,31.2 v1(32.6,31.2)
  Bottom Layer w0.381: v1(32.6,31.2) 32.8,31.2 38.73,25.27 J1.11
GPIO5: J1.13 U1.4 | length 32.2
  Top Layer w0.381: U1.4 v1(32.64,32.46)
  Bottom Layer w0.381: v1(32.64,32.46) 41.27,23.83 J1.13
GPIO6: J1.15 U1.25 | length 29.6
  Top Layer w0.381: J1.15 43.81,28.079 47.932,32.2 48.49,32.2 U1.25
GPIO7: J1.17 S2.2 U1.15 | length 50.5
  Top Layer w0.35: S2.2 20.821,6.25 25.535,1.536 46.845,1.536 47.544,2.235 47.544,4.076 J1.17
  Top Layer w0.381: J1.17 48.75,7.67 U1.15
GPIO8: J1.19 U1.16 | length 17
  Top Layer w0.381: U1.16 49.01,20.77 49.568,20.77 49.945,20.394 49.945,6.325 J1.19
GPIO9: J1.21 U1.17 | length 18.5
  Top Layer w0.381: U1.17 49.01,22.04 49.568,22.04 51.43,20.179 J1.21
GPIO10: J1.23 U1.18 | length 20.8
  Top Layer w0.381: U1.18 49.01,23.31 49.568,23.31 53.97,18.909 J1.23
GPIO11: J1.24 U1.19 | length 25.5
  Top Layer w0.381: U1.19 50.86,24.84 v1(51.2,24.5)
  Bottom Layer w0.381: v1(51.2,24.5) 52.639,23.06 52.639,4.06 J1.24
GPIO12: J1.22 U1.20 | length 25.1
  Top Layer w0.381: U1.20 48.86,26 v1(49.9,26)
  Bottom Layer w0.381: v1(49.9,26) 50.22,25.679 50.22,3.939 J1.22
GPIO13: J1.20 U1.21 | length 26.5
  Top Layer w0.381: v1(47.4,27.1) 47.428,27.128 48.498,27.128 U1.21
  Bottom Layer w0.381: v1(47.4,27.1) 47.68,26.819 47.68,3.939 J1.20
GPIO14: J1.18 U1.23 | length 29.7
  Top Layer w0.381: v1(47,29.1) 47.56,29.66 48.49,29.66 U1.23
  Bottom Layer w0.381: J1.18 45.14,3.939 45.14,27.24 v1(47,29.1)
GPIO15: J1.16 U1.24 | length 30.8
  Top Layer w0.381: J1.16 45.14,4.06 45.14,28.139 47.932,30.93 48.49,30.93 U1.24
NetB1_2: B1.2 C10.2 | length 11.5
  Top Layer w0.25: B1.2 15.955,34.579 15.955,35.555 v1(16.4,36) ; v1(18.3,41.4) 18.3,42.35 19.525,43.575 19.525,43.625 19.75,43.85 C10.2
  Bottom Layer w0.25: v1(16.4,36) 16.961,36 18.3,37.339 v1(18.3,41.4)
NetB1_3: B1.3 R10.1 R11.2 | length 16.8
  Top Layer w0.3: v1(13.3,41.1) 15.3,43.1 15.3,45.498 ; v1(14.246,36.9) 16.4,36.9 17.035,36.265 B1.3
  Top Layer w0.35: R10.1 15.3,45.498 R11.2 R11.2@16.184,45.498
  Bottom Layer w0.3: v1(13.3,41.1) 13.3,37.846 v1@14.236,36.91
NetB1_6: B1.6 D4.2 R9.1 | length 13.4
  Top Layer w0.35: D4.2 D4.2@16.668,31.15 ; B1.6 17.035,37.461 19.134,35.362 19.134,33.334 16.95,31.15 D4.2@16.668,31.15 ; R9.1@18.432,29.548 18.27,29.548 18.161,29.656 D4.2@16.668,31.15
NetB1_7: B1.7 R12.2 | length 4.4
  Top Layer w0.5: R12.2 14.333,37.848 15.69,39.204 15.69,39.736 B1.7
NetB1_8: B1.8 R11.1 R13.2 | length 6.7
  Top Layer w0.25: B1.8 14.495,41.547 15.905,42.957 15.905,43.623 16.184,43.902 R13.2
NetC3_2: C3.2 R2.1 S1.1 U1.3 | length 53.4
  Top Layer w0.35: U1.3 32.57,33.73 v1(32.8,33.5) ; v1(51.4,29.8) 55.199,26.001 55.199,12.772 58.998,8.974 R2.1 ; C3.2 59.024,4.204 59.024,5.974 R2.1 ; S1.1 61.5,6 R2.1
  Bottom Layer w0.35: v1(32.8,33.5) 36.5,29.8 v1(51.4,29.8)
NetC4_2: C4.2 S1.2 | length 10.9
  Top Layer w0.35: C4.2 60.527,2.2 64.577,6.25 S1.2
NetC5_2: C5.2 S2.1 | length 3.5
  Top Layer w0.3: C5.2 10.35,4.85 S2.1
NetC6_2: C6.2 J7.SHELL R6.2 | length 22.8
  Top Layer w0.3: J7.SHELL@72.889,6.68 77.069,6.68 J7.SHELL@77.069,15.32 ; J7.SHELL@72.889,15.32 J7.SHELL@77.069,15.32 ; C6.2 77.8,15.841 77.751,15.792 77.751,15.782 77.289,15.32 J7.SHELL@77.069,15.32
  Top Layer w0.35: R6.2 72.1,6.276 72.504,6.68 J7.SHELL@72.889,6.68
NetC11_1: C11.1 U2.6 | length 2.7
  Bottom Layer w0.35: C11.1 17.65,28.17 18.03,28.55 U2.6
NetC11_2: C11.2 L1.2 U2.2 | length 7.4
  Bottom Layer w0.35: L1.2 14.169,29.923 14.526,29.565 15.485,29.565 U2.2 15.654,29.396 16.089,29.396 16.478,29.007 16.478,27.98 15.95,27.452 C11.2
NetC15_1: C15.1 L2.1 U3.2 | length 15.4
  Bottom Layer w0.5: C15.1 18.55,47.35 18.272,47.072 18.272,43.562 18.706,43.129 19.246,43.129 U3.2 19.495,43.1 19.599,43.204 22.559,43.204 22.854,42.909 22.854,41.069 21.675,39.89 21.675,38.05 21.025,37.4 L2.1
NetC15_2: C15.2 U3.6 | length 3.6
  Bottom Layer w0.5: U3.6 16.745,44.05 16.85,44.155 C15.2
NetC23_2: C23.2 C24.2 D10.1 J4.1 J6.1 R1.1 U5.7 | length 61.5
  Top Layer w0.381: R1.1@64.8,50.973 64.8,58.145 J6.1 64.488,58.457 65.543,58.457 67.246,56.754 67.246,47.546 65.95,46.25 63.25,46.25 63.09,46.09 63.09,46.04 62.065,45.015 U5.7 62.065,42.173 63.488,40.75 C23.2 ; C23.2@67.95,40.75 68.745,39.955 70.155,39.955 71.048,40.848 71.728,40.848 D10.1
  Bottom Layer w0.381: J4.1 45.645,59.7 63.245,59.7 J6.1
NetC24_1: C24.1 C25.1 D10.2 J4.3 J6.3 J8.2 U5.6 | length 51.3
  Top Layer w0.381: v1(60.71,60.335) 61.691,59.355 61.691,58.714 J6.3 61.905,50.025 J8.2 ; v1(64.2,45.6) 64.2,45.4 63.35,44.55 C24.1 63.317,44.533 63.317,42.639 U5.6 63.335,42.173 64.059,41.449 66.309,41.449 66.405,41.545 68.655,41.545 69.45,40.75 69.61,40.91 70.21,40.91 v1(70.4,41.1) ; v1(71,38.5) 71.245,38.5 71.625,38.88 D10.2
  Bottom Layer w0.381: J4.3 43.74,60.335 v1(60.71,60.335) ; J8.2 63.53,48.17 64.2,47.5 v1(64.2,45.6) ; v1(70.4,41.1) 70.4,39.1 v1(71,38.5)
NetCR1_1: CR1.1 J7.A6 J7.B6 | length 9.4
  Top Layer w0.2: CR1.1 68.926,10.15 69.526,10.75 J7.A6 73.35,10.75 73.6,11 73.6,11.5 73.35,11.75 J7.B6
NetCR1_3: CR1.3 J7.A7 J7.B7 | length 10
  Top Layer w0.2: CR1.3 68.826,12.05 v1(69.226,11.65) 69.626,11.25 J7.A7 ; v1(70.6,10.2) 70.641,10.2 70.691,10.25 J7.B7
  Bottom Layer w0.2: v1(69.226,11.65) 69.255,11.621 69.255,11.545 v1(70.6,10.2)
NetD1_A: D1.A J7.A4-B9 J7.B4-A9 | length 12.8
  Top Layer w0.2: J7.A4-B9 72.458,8.744 73.032,8.744 74.054,9.765 74.054,12.235 73.032,13.256 72.458,13.256 J7.B4-A9
  Top Layer w0.381: D1.A 69.163,14.2 69.963,13.4 J7.B4-A9
NetD2_1: D2.1 R7.2 | length 1.9
  Top Layer w0.3: D2.1 5.595,8.3 R7.2
NetD3_1: D3.1 J1.01 TR1.9 | length 11.9
  Top Layer w0.3: TR1.9@21.5,9.29 21.616,9.406 TR1.9
  Top Layer w0.381: TR1.9 22.261,9.406 22.337,9.33 22.337,8.963 J1.01
  Bottom Layer w0.4: D3.1@22.2,9.1 J1.01
NetD4_1: D4.1 R8.1 | length 2.2
  Top Layer w0.5: R8.1 14.266,29.476 16.374,29.476 D4.1
NetD7_1: D7.1 R16.1 | length 1.9
  Top Layer w0.25: D7.1 5.595,22.3 R16.1
NetD8_1: D8.1 R17.1 | length 1.9
  Top Layer w0.25: D8.1 5.595,24.8 R17.1
NetD9_1: D9.1 R18.1 | length 1.9
  Top Layer w0.25: D9.1 5.595,27.3 R18.1
NetF1_1: F1.1 TR1.16 | length 22.6
  Top Layer w0.381: TR1.16 33.004,18.296 40.8,10.5 F1.1
NetF2_1: F2.1 TR1.15 | length 19.6
  Top Layer w0.381: TR1.15 31.741,17.026 38.267,10.5 F2.1
NetF3_1: F3.1 TR1.14 | length 16.5
  Top Layer w0.381: TR1.14 30.477,15.756 35.733,10.5 F3.1
NetF4_1: F4.1 TR1.13 | length 13.5
  Top Layer w0.381: TR1.13 29.214,14.486 33.2,10.5 F4.1
NetF5_1: F5.1 TR1.12 | length 10.4
  Top Layer w0.381: TR1.12 27.951,13.216 30.667,10.5 F5.1
NetF6_1: F6.1 TR1.11 | length 7.3
  Top Layer w0.381: TR1.11 26.687,11.946 28.133,10.5 F6.1
NetF7_1: F7.1 TR1.10 | length 4.3
  Top Layer w0.381: TR1.10 21.876,10.6 25.9,10.6 F7.1
NetIC1_1: IC1.1 TR1.7 | length 5.1
  Top Layer w0.381: IC1.1@11.225,10.676 TR1.7
NetIC1_2: IC1.2 TR1.6 | length 5.1
  Top Layer w0.381: IC1.2@11.225,11.946 TR1.6
NetIC1_3: IC1.3 TR1.5 | length 5.1
  Top Layer w0.381: IC1.3@11.225,13.216 TR1.5
NetIC1_4: IC1.4 TR1.4 | length 5.1
  Top Layer w0.381: IC1.4@11.225,14.486 TR1.4
NetIC1_5: IC1.5 TR1.3 | length 5.1
  Top Layer w0.381: IC1.5@11.225,15.756 TR1.3
NetIC1_6: IC1.6 TR1.2 | length 5.1
  Top Layer w0.381: IC1.6@11.225,17.026 TR1.2
NetIC1_7: IC1.7 TR1.1 | length 5.1
  Top Layer w0.381: IC1.7@11.225,18.296 TR1.1
NetIC1_11: IC1.11 R3.1 U1.10 | length 29
  Top Layer w0.4: IC1.11 6.725,17.026 7.199,17.5 7.221,17.5 8.338,18.617 8.338,19.962 13.177,24.802 R3.1 28.099,24.821 31.231,24.821 U1.10
NetIC1_15: IC1.15 R7.1 | length 4.5
  Top Layer w0.3: IC1.15 6.725,11.946 7.454,11.217 7.454,9.917 7.198,9.661 R7.1
NetJ4_2: J4.2 J5.1 | length 7.9
  Top Layer w0.381: J4.2 43.175,52.285 J5.1
NetJ4_4: J4.4 J5.3 | length 13.9
  Top Layer w0.381: J4.4 40.635,52.596 45.206,48.025 47.485,48.025 J5.3
NetJ4_5: J4.5 J6.5 J?.1 | length 39
  Top Layer w0.35: J?.1 59.371,45.671 v2(59.371,49.252) ; v1(58.3,60.955) 59.145,60.11 59.145,58.72 J6.5
  Bottom Layer w0.35: J4.5 41.819,60.955 v1(58.3,60.955) ; J6.5 59.365,49.257 v2(59.371,49.252)
NetJ4_6: J4.6 J5.2 | length 14.1
  Top Layer w0.381: J4.6 38.095,52.305 43.67,46.73 J5.2
NetJ4_8: J4.8 J5.4 | length 19.9
  Top Layer w0.381: J4.8 35.769,55.746 35.769,52.631 42.915,45.485 47.485,45.485 J5.4
NetJ5_5: J5.5 J6.2 | length 17.9
  Bottom Layer w0.35: J5.5 52.499,48.041 59.014,48.041 63.175,52.202 J6.2
NetJ5_6: J5.6 J6.4 | length 16.7
  Top Layer w0.381: J5.6 52.515,45.485 54.326,45.485 60.48,51.64 60.48,55.805 J6.4
NetJ5_7: J5.7 J6.6 | length 8.5
  Top Layer w0.381: J5.7 58.095,53.555 J6.6
NetJ5_8: J5.8 J6.8 | length 11
  Top Layer w0.381: J5.8 52.565,47.975 52.565,52.97 J6.8
NetJ7_A5: J7.A5 R4.2 | length 12
  Top Layer w0.2: R4.2 60.798,10.184 61.465,9.517 70.665,9.517 70.898,9.75 J7.A5
NetJ7_B5: J7.B5 R5.2 | length 11.7
  Top Layer w0.2: R5.2 v1(61.9,12.2) ; v1(68.3,12.7) 68.341,12.7 68.391,12.75 J7.B5
  Bottom Layer w0.2: v1(61.9,12.2) 67.8,12.2 v1(68.3,12.7)
NetJ8_1: J8.1 R1.2 | length 2.7
  Top Layer w0.381: J8.1 66.07,48.675 66.398,49.003 R1.2
NetR14_1: R14.1 R15.2 U2.4 | length 20.7
  Bottom Layer w0.35: R14.1 9.922,30.381 9.922,29.45 14.587,24.784 18.184,24.784 20.4,27 R15.2 20.284,30.802 19.931,30.45 U2.4
NetR19_1: R19.1 R20.2 U3.4 | length 6.6
  Bottom Layer w0.5: R19.1 14.416,43.698 15.935,42.179 16.496,42.179 U3.4 ; R19.1@14.362,43.698 14.516,43.852 R20.2
NetSJ1_1: SJ1.1 U5.8 | length 19.1
  Top Layer w0.381: U5.8 60.795,41.305 v1(61.3,40.8) ; v1(75.1,37.8) 77.05,37.8 SJ1.1
  Bottom Layer w0.381: v1(61.3,40.8) 64.3,37.8 v1(75.1,37.8)
OUT0: F1.2 J1.14 | length 6.2
  Top Layer w0.381: F1.2 41.6,7.7 41.909,7.39 41.909,7.352 42.479,6.782 42.479,3.939 J1.14
OUT1: F2.2 J1.12 | length 6.2
  Top Layer w0.381: F2.2 39.067,7.7 39.376,7.39 39.376,7.382 39.939,6.818 39.939,3.939 J1.12
OUT2: F3.2 J1.10 | length 6.2
  Top Layer w0.381: F3.2 36.443,7.39 36.864,7.39 37.399,6.855 37.399,3.939 J1.10
OUT3: F4.2 J1.08 | length 6.2
  Top Layer w0.381: F4.2 34,7.7 34.309,7.39 34.309,7.374 34.859,6.824 34.859,3.939 J1.08
OUT4: F5.2 J1.06 | length 6.2
  Top Layer w0.381: F5.2 31.467,7.7 31.776,7.39 31.776,7.353 32.319,6.81 32.319,3.939 J1.06
OUT5: F6.2 J1.04 | length 6.2
  Top Layer w0.381: F6.2 28.933,7.7 29.243,7.39 29.243,7.349 29.779,6.813 29.779,3.939 J1.04
OUT6: F7.2 J1.02 | length 6.2
  Top Layer w0.381: F7.2 26.4,7.7 27.239,6.86 27.239,3.939 J1.02
RCK: IC1.12 U1.12 | length 27.7
  Top Layer w0.4: IC1.12 7.956,15.756 v1(8.3,16.1) ; v1(27.3,22.3) U1.12
  Bottom Layer w0.4: v1(8.3,16.1) 14.5,22.3 v1(27.3,22.3)
RX: U1.26 U6.2 | length 17.7
  Top Layer w0.381: U1.26 51.07,33.73 v1(54,30.8) ; U6.2 59.465,23.765 v1(59.5,23.8)
  Bottom Layer w0.381: v1(54,30.8) 59.5,25.3 v1(59.5,23.8)
SI: IC1.14 U1.11 | length 32.3
  Top Layer w0.4: IC1.14 7.706,13.216 8.992,14.502 8.992,19.692 12.87,23.57 U1.11
TX: U1.27 U6.3 | length 19.4
  Top Layer w0.381: U1.27 50.951,35 v1(55.375,30.575) ; v1(60.7,23.9) 60.7,21.934 U6.3
  Bottom Layer w0.381: v1(55.375,30.575) 60.7,25.251 v1(60.7,23.9)
USB_N: CR1.4 U1.13 | length 61.6
  Top Layer w0.35: U1.13 31.525,21.305 32.062,21.305 35.812,25.055 35.812,32.628 40.937,37.753 49.928,37.753 57.013,30.668 57.013,18.965 63.356,12.623 63.356,12.154 63.46,12.05 CR1.4
USB_P: CR1.6 U1.14 | length 63.4
  Top Layer w0.35: U1.14 31.525,20.035 32.062,20.035 36.416,24.389 36.416,32.378 41.187,37.149 49.678,37.149 56.409,30.418 56.409,18.545 62.504,12.45 62.504,10.89 63.14,10.254 63.565,10.254 CR1.6
pads on no net: IC1.9 J4. J4.7 J6. J6.7 J7.17 J7.18 J7.A8 J7.B8 S1.3 S2.3 S2.4 U1.22 U2.5 U4.11 U5.5

## Polygon pours and split planes (outlines as drawn)
GND on Bottom Layer "GND_L02_P001" (solid, remove dead copper, pour order 1): 1.506,0.006 cw(c1.506,1.506) 0.006,1.506 0.006,48.506 cw(c1.506,48.506) 1.506,50.006 28.506,50.006 ccw(c28.506,51.506) 30.006,51.506 30.006,73.506 cw(c31.506,73.506) 31.506,75.006 68.506,75.006 cw(c68.506,73.506) 70.006,73.506 70.006,51.506 ccw(c71.506,51.506) 71.506,50.006 78.006,50.006 cw(c78.006,48.006) 80.006,48.006 80.006,1.506 cw(c78.506,1.506) 78.506,0.006
+3V3 on Bottom Layer "+3V3_L02_P000" (solid, remove dead copper, pour order 0): 9.2,34.8 12.8,34.8 12.8,31.9 9.2,31.9
GND on Top Layer "GND_L01_P004" (solid, remove dead copper, pour order 4): 1.506,0.006 cw(c1.506,1.506) 0.006,1.506 0.006,48.506 cw(c1.506,48.506) 1.506,50.006 28.506,50.006 ccw(c28.506,51.506) 30.006,51.506 30.006,73.506 cw(c31.506,73.506) 31.506,75.006 68.506,75.006 cw(c68.506,73.506) 70.006,73.506 70.006,51.506 ccw(c71.506,51.506) 71.506,50.006 78.006,50.006 cw(c78.006,48.006) 80.006,48.006 80.006,1.506 cw(c78.506,1.506) 78.506,0.006

## Keep-outs
Keep-Out Layer:
  the board outline again, w0.8

## Silkscreen, mask and mechanical layers (free items; w line width, h text height)
Bottom Overlay:
  drawing of 66 lines, arcs and shapes, not listed
  text "CAN-G" at 40.2,64.4 h1.52 r90
  text "CAN-L" at 42.7,64.4 h1.52 r90
  text "CAN-H" at 45.2,64.4 h1.52 r90
  text "CAN-G" at 60.1,64.4 h1.52 r90
  text "CAN-L" at 62.65,64.4 h1.52 r90
  text "CAN-H" at 65.2,64.4 h1.52 r90
  text "version 1.0" at 46.4,24.1 h1.52
  text "ESP32_CAN_V2" at 70.9,24.1 h1.52
  text "GND / 12V / 5V0 / 3V3" at 6.1,22.5 h2
  text "Designed by: Balazs Finaczy" at 70.9,20.8 h1.52
Mechanical 2:
  circle w0.013: c76.506,3.506 r1.5
  circle w0.013: c3.506,46.506 r1.5
  circle w0.013: c3.506,3.506 r1.5
  circle w0.013: c76.506,46.506 r1.5
  circle w0.006: c0.006,0.006 r0.003
  circle w0.006: c80.006,0.006 r0.003
  circle w0.006: c70.006,75.006 r0.003
  circle w0.006: c30.006,50.006 r0.003
  circle w0.006: c70.006,50.006 r0.003
  circle w0.006: c0.006,50.006 r0.003
  circle w0.006: c0.006,0.006 r0.003
  circle w0.013: c76.506,46.506 r1.5
  circle w0.013: c76.506,3.506 r1.5
  circle w0.013: c3.506,3.506 r1.5
  circle w0.013: c3.506,46.506 r1.5
  circle w0.006: c70.148,75.006 r0.003
  circle w0.006: c0.006,50.006 r0.003
  circle w0.006: c80.006,0.006 r0.003
  circle w0.006: c30.148,50.006 r0.003
  circle w0.006: c70.148,50.006 r0.003
  circle w0.006: c0.006,0.006 r0.003
  circle w0.006: c0.006,0.006 r0.003
  lines w0.013: 0.006,1.506 ccw(c1.506,1.506) 1.506,0.006 78.506,0.006 ccw(c78.506,1.506) 80.006,1.506 80.006,48.006 ccw(c78.006,48.006) 78.006,50.006 71.506,50.006 cw(c71.506,51.506) 70.006,51.506 70.006,73.506 ccw(c68.506,73.506) 68.506,75.006 31.506,75.006 ccw(c31.506,73.506) 30.006,73.506 30.006,51.506 cw(c28.506,51.506) 28.506,50.006 1.506,50.006 ccw(c1.506,48.506) 0.006,48.506 0.006,1.506

## Text inside footprints (layer, text, board x,y; h text height)
CR1: Top Overlay "*" at 65.875,10.923 h1.27 r180; Mechanical 13 "*" at 65.848,10.922 h1.27 r180
TR1: Top Overlay "*" at 17.152,17.517 h1.27; Mechanical 13 "*" at 17.148,17.496 h1.27
U2: Mechanical 13 "*" at 16.113,29.297 h1.27 r180; Bottom Overlay "*" at 16.125,29.285 h1.27 r180
U3: Mechanical 13 "*" at 18.713,43.278 h1.27; Bottom Overlay "*" at 18.713,43.285 h1.27
U4: Top Overlay "*" at 66.978,30.887 h1.27; Mechanical 13 "*" at 66.966,30.873 h1.27
U5: Top Overlay "*" at 60.364,36.607 h1.27 r90; Mechanical 13 "*" at 61.544,37.97 h1.27 r90